# EAGLE board PCB v2 (EAGLE 9.7.0)
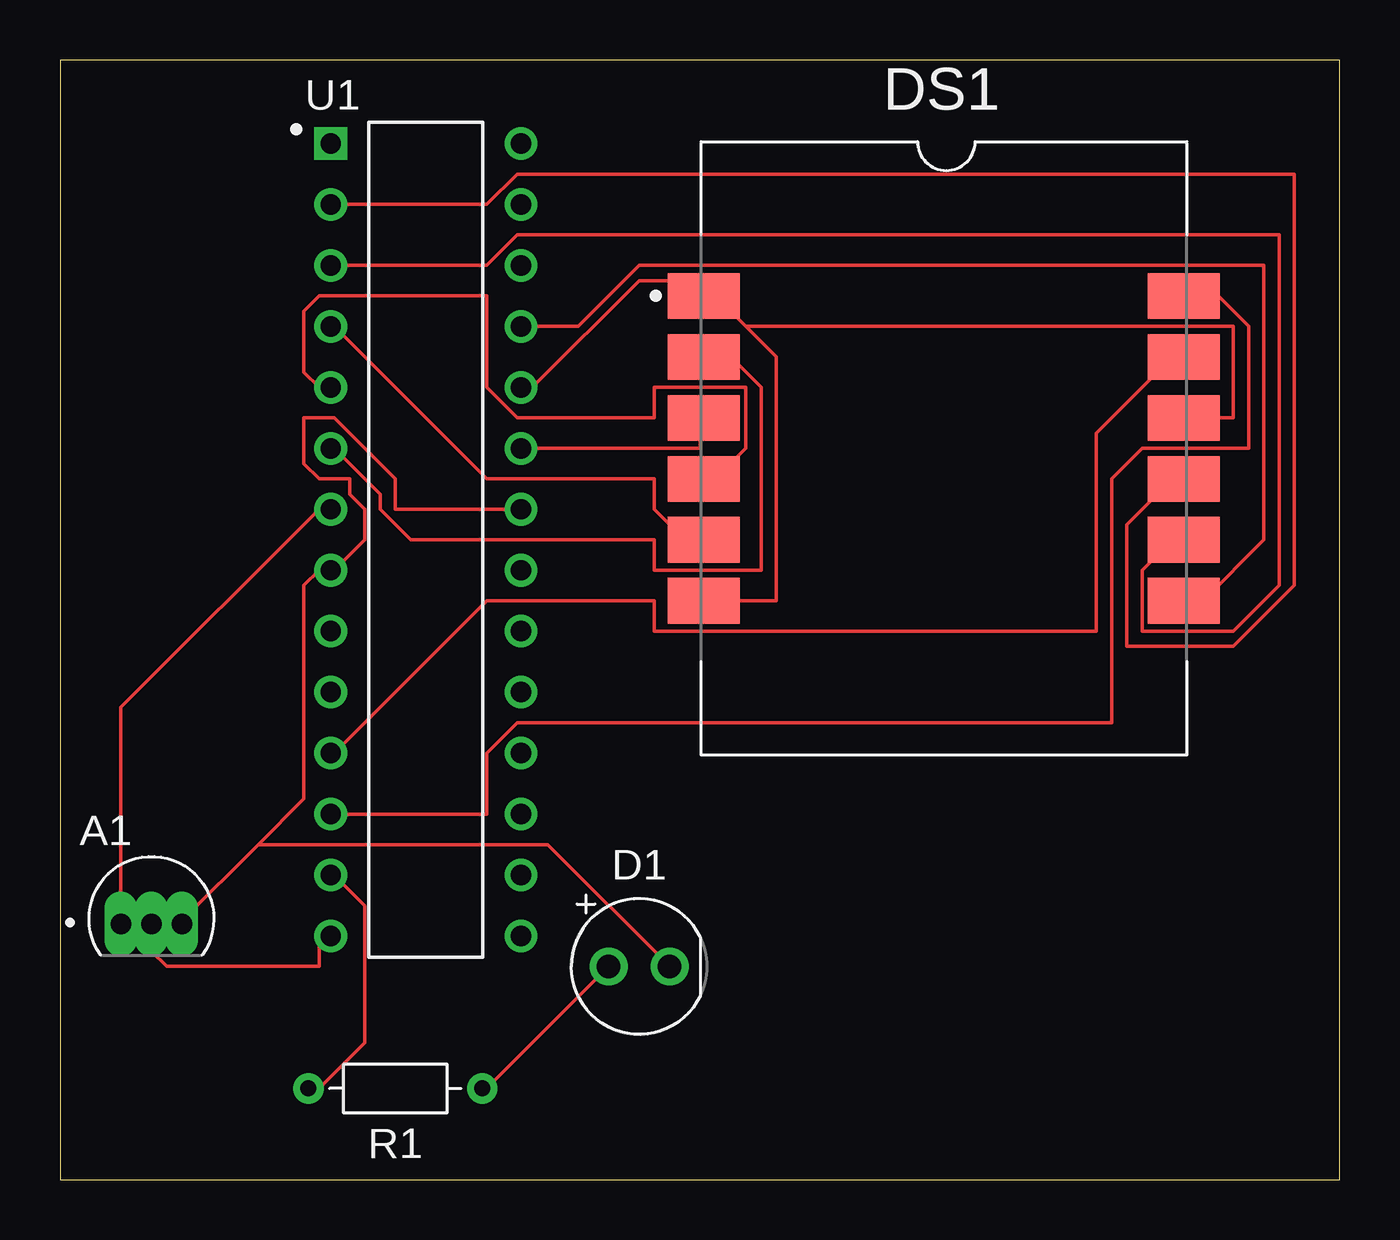
[diagram p0: board, top side]

Size 53.32 x 46.66 mm. Coordinates in mm from the lower left corner, seen from the top.
Outline: 0,0 53.32,0 53.32,46.66 0,46.66 0,0
Copper layers (1*16): Top / Bottom
Stack-up Default Layer Stack: Top User Defined 0.035mm / Dielectric-1 User Defined 1.5mm / Bottom User Defined 0.035mm
Design rules "default": minimum track width 6mil, minimum drill 0.35mm, track to track 6mil, track to pad 6mil, pad to pad 6mil, via to via 6mil, smd to smd 6mil, copper to edge 40mil, drill to drill 6mil, minimum pad ring 10mil, minimum via ring 8mil, stop-mask expansion 4mil, vias tented up to drill 0mil, thermal gap 10mil

## Footprints (pad centres in the part's own frame; a part is rotated, then mirrored left to right if it is on the bottom)
TO92127P521H735-3 = drill 0.85 pad 1.07 long: 1 -1.27,-0.775; 2 0,-0.775; 3 1.27,-0.775
LEDRD254W60D565H860B = drill 0.981 pad 1.581: 1 -1.27,0; 2 1.27,0
ACDA56-51SURKWA = smd 3 x 1.9: 1 -10,6.35; 2 -10,3.81; 3 -10,1.27; 4 -10,-1.27; 5 -10,-3.81; 6 -10,-6.35; 7 10,-6.35; 8 10,-3.81; 9 10,-1.27; 10 10,1.27; 11 10,3.81; 12 10,6.35
RESAD724W46L381D178B = drill 0.66 pad 1.26: 1 -3.62,0; 2 3.62,0
DIP794W46P254L2967H457Q28B = drill 0.85 square: 1 -3.96,16.51 | drill 0.85: 2 -3.96,13.97; 3 -3.96,11.43; 4 -3.96,8.89; 5 -3.96,6.35; 6 -3.96,3.81; 7 -3.96,1.27; 8 -3.96,-1.27; 9 -3.96,-3.81; 10 -3.96,-6.35; 11 -3.96,-8.89; 12 -3.96,-11.43; 13 -3.96,-13.97; 14 -3.96,-16.51; 15 3.96,-16.51; 16 3.96,-13.97; 17 3.96,-11.43; 18 3.96,-8.89; 19 3.96,-6.35; 20 3.96,-3.81; 21 3.96,-1.27; 22 3.96,1.27; 23 3.96,3.81; 24 3.96,6.35; 25 3.96,8.89; 26 3.96,11.43; 27 3.96,13.97; 28 3.96,16.51

## Placement (x,y rotation side)
A1  LM35DZ/NOPB  [TO92127P521H735-3]  3.81,11.43 0 top
D1  LED_RED  [LEDRD254W60D565H860B]  24.13,8.89 0 top
DS1  ACDA56-51SUR  [ACDA56-51SURKWA]  36.83,30.48 0 top
R1  [RESAD724W46L381D178B]  13.97,3.81 180 top
U1  ATMEGA328P-PU  [DIP794W46P254L2967H457Q28B]  15.24,26.67 0 top

## Library data of the parts
A1 = LM35DZ_NOPB; MANUFACTURER: Texas Instruments; MAXIMUM_PACKAGE_HEIGHT: 7.35mm; PARTREV: H; SNAPEDA_PACKAGE_ID: 102642; STANDARD: IPC-7351B
D1 = Opto-Electronic; CATEGORY: Opto-Electronic; SUB-CATEGORY: LED
DS1 = Display_LED; CATEGORY: DISPLAY; COLOR: Hyper Red (AlGaInP); CONFIGURATION: Common Anode; DESCRIPTION: The Hyper Red source color devices are made with AlGaInP on GaAs substrate Light Emitting Diode; DIGIT: Dual Digit; MANUFACTURER: Kingbright; MPN: ACDA56-51SURKWA; OPERATING_TEMP: -40°C to +85 °C; PART_STATUS: Active; ROHS_COMPLIANT: COMPLIANT; SERIES: -; SUB-CATEGORY: LED; THERMALLOSS: 0.075 W; TYPE: 7-Segment
R1 = Resistor; CATEGORY: Resistor; SUB-CATEGORY: Fixed
U1 = ATMEGA328P-PU; MANUFACTURER: Atmel

## Nets
AVCC: U1.20
GND: A1.3 D1.2 U1.8 U1.22
N$1: A1.2 U1.14
N$2: D1.1 R1.1
N$3: DS1.9 U1.2
N$4: DS1.8 U1.3
N$5: DS1.5 U1.4
N$6: DS1.4 U1.5
N$7: DS1.2 U1.6
N$8: DS1.11 U1.11
N$9: DS1.12 U1.12
N$10: R1.2 U1.13
N$11: DS1.3 U1.23
N$12: DS1.1 DS1.6 DS1.10 U1.24
N$13: DS1.7 U1.25
VCC: A1.1 U1.7

## Tracks (layer width: path | path; a pad name or v marks a point on that pad's centre or on a via)
GND
  Top 0.152: 8.25,13.97 10.16,15.88 10.16,24.77 10.8,25.4 U1.8 11.43,25.4 12.7,26.67 12.7,27.94 12.07,28.58 12.07,29.21 10.8,29.21 10.16,29.84 10.16,31.75 11.43,31.75 13.97,29.21 13.97,27.94 U1.22 | 8.25,13.97 5.08,10.8 A1.3 | D1.2 20.32,13.97 8.25,13.97
N$1
  Top 0.152: A1.2 3.81,9.52 4.45,8.89 10.8,8.89 10.8,10.16 U1.14
N$2
  Top 0.152: D1.1 17.78,3.81 R1.1
N$3
  Top 0.152: U1.2 17.78,40.64 19.05,41.91 51.44,41.91 51.44,24.77 48.9,22.22 44.45,22.22 44.45,27.3 46.36,29.21 DS1.9
N$4
  Top 0.152: U1.3 17.78,38.1 19.05,39.37 50.8,39.37 50.8,24.77 48.9,22.86 45.09,22.86 45.09,25.4 46.36,26.67 DS1.8
N$5
  Top 0.152: DS1.5 26.04,26.67 24.77,27.94 24.77,29.21 17.78,29.21 11.43,35.56 U1.4
N$6
  Top 0.152: U1.5 10.8,33.02 10.16,33.66 10.16,36.19 10.8,36.83 17.78,36.83 17.78,33.02 19.05,31.75 24.77,31.75 24.77,33.02 28.57,33.02 28.57,30.48 27.3,29.21 DS1.4
N$7
  Top 0.152: DS1.2 27.94,34.29 29.21,33.02 29.21,25.4 24.77,25.4 24.77,26.67 14.61,26.67 13.34,27.94 13.34,28.58 11.43,30.48 U1.6
N$8
  Top 0.152: U1.11 11.43,17.78 17.78,24.13 24.77,24.13 24.77,22.86 43.18,22.86 43.18,31.11 46.36,34.29 DS1.11
N$9
  Top 0.152: U1.12 17.78,15.24 17.78,17.78 19.05,19.05 43.81,19.05 43.81,29.21 45.09,30.48 49.53,30.48 49.53,35.56 48.26,36.83 DS1.12
N$10
  Top 0.152: R1.2 10.8,3.81 12.7,5.71 12.7,11.43 11.43,12.7 U1.13
N$11
  Top 0.152: U1.23 26.67,30.48 26.67,31.75 DS1.3
N$12
  Top 0.152: U1.24 19.69,33.02 24.13,37.47 26.67,37.47 26.67,36.83 DS1.1 27.3,36.83 28.57,35.56 | DS1.6 29.84,24.13 29.84,34.29 28.57,35.56 | DS1.10 48.9,31.75 48.9,35.56 28.57,35.56
N$13
  Top 0.152: U1.25 21.59,35.56 24.13,38.1 50.16,38.1 50.16,26.67 47.62,24.13 DS1.7
VCC
  Top 0.152: A1.1 2.54,19.69 10.8,27.94 U1.7